# Altium PCB AD8428_shield.PcbDoc
Units mil, origin at the board's own origin, x right, y up, seen from the top; angles counter-clockwise.
Board outline 688 x 400 mil, 2 copper layers (Top, Bottom), stack 61.811 mil thick; 3 components, 8 nets, 16 pads, 0 vias.
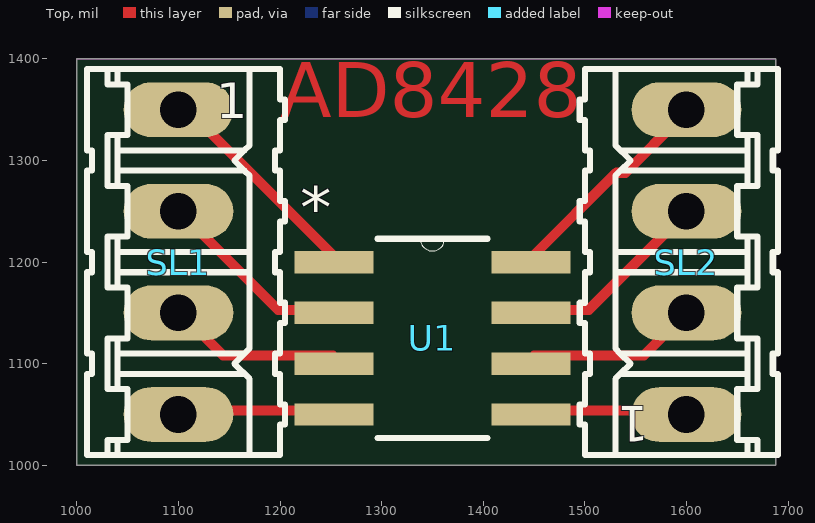
[diagram p0: Top view]
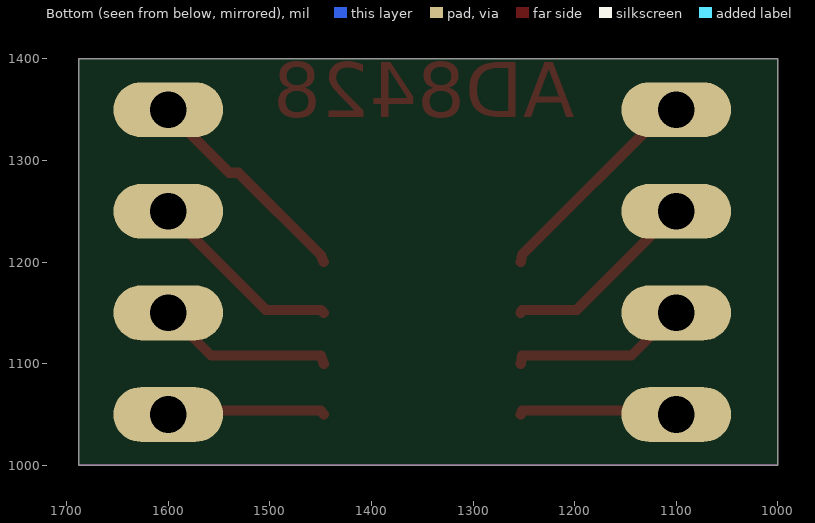
[diagram p1: Bottom view, seen from below]

## Layer stack, top to bottom
Top Solder: solder mask 0.4, Solder Resist, Dk 3.5
Top: signal copper 1.378
Dielectric 1: core 59.0551, FR-4, Dk 4.8
Bottom: signal copper 1.378
Bottom Solder: solder mask 0.4, Solder Resist, Dk 3.5

## Board outline
1000,1000 1688,1000 1688,1400 1000,1400

## Design rules (kind name [scope] priority, off if disabled: settings)
Clearance mdViaVia [IsVia vs IsVia] p1: gap=8
Clearance mdPadVia [IsPad vs IsVia] p2: gap=8
Clearance mdPadPad [IsPad vs IsPad] p3: gap=8
Clearance mdWireVia [(InLayerClass('Signal Layers') AND IsTrack) vs IsVia] p4: gap=8
Clearance mdWirePad [(InLayerClass('Signal Layers') AND IsTrack) vs IsPad] p5: gap=8
Clearance mdWireWire [(InLayerClass('Signal Layers') AND IsTrack) vs (InLayerClass('Signal Layers') AND IsTrack)] p6: gap=8
Clearance [All] p7: gap=8
HoleSize [All] p1: absolutevalues=TRUE maxlimit=100000 minlimit=24 maxpercent=80.000 minpercent=20.000
HoleToHoleClearance [All] p1: gap=8 allowstackedmicrovias=TRUE
PolygonConnect ThermalVias [IsVia] p1: connectstyle=Direct reliefconductorwidth=10 reliefentries=4 polygonreliefangle="90 Angle" airgapwidth=10
PolygonConnect [All] p2: connectstyle=Relief reliefconductorwidth=10 reliefentries=4 polygonreliefangle="90 Angle" airgapwidth=10
RoutingVias [All] p1: holewidth=28 width=50 viastyle="Through Hole" minholewidth=28 minwidth=50 maxholewidth=28 maxwidth=50
SilkToSilkClearance [All] p1 off: silktosilkclearance=10
SilkToSolderMaskClearance [IsPad] p1 off: minsilkscreentomaskgap=10 clearancetoexposedcopper=TRUE
SolderMaskExpansion [All] p1: expansion=4
UnpouredPolygon [All] p1: allowunpoured=FALSE
Width [All] p1: maxlimit=100000 minlimit=10 preferedwidth=10
25 further rules are at their usual default settings.

## Components (designator, comment, footprint, x,y, rotation, side; value= is the part's Value field where it differs from the comment)
SL1 "" 04P 1100,1200 r270 top
SL2 "" 04P 1600,1200 r90 top
U1 "AD8428ARZ" SOIC127P600X175-8N 1350,1125 r0 top

## Footprints (in the part's own frame and the unit in brackets; to place one, negate y for a bottom-side part, rotate by r counter-clockwise, add the part's x,y. Pads: shape width x height; smd on the part's side, far side on the other; paste and mask are expansions set on the pad)
04P [mil] "04P"
  oval 54x108 hole 36: 1(-150,0) 2(-50,0) 3(50,0) 4(150,0)
  silkscreen extent -190,-90 190,105
SOIC127P600X175-8N [mil] "SOIC127P600X175-8N"
  rect 78x22 smd: 1(-97,75) 2(-97,25) 3(-97,-25) 4(-97,-75) 5(97,-75) 6(97,-25) 7(97,25) 8(97,75)
  silkscreen extent -54,-98 54,98

## Part data
SL1 SL2: library part 04P
U1: library part SOIC127P600X175-8N

## Nets (pads, with @x,y where several pads share a name; then routed paths per layer and width w, separated by ;. In a path a pad name is that pad's centre, name@x,y a point inside that pad or via, vN(x,y) a via of type N, cw(c..) or ccw(c..) an arc to the next point about the centre after c; other vN are vias at no path point)
N$1: SL1.1 U1.1 | length 218.8
  Top w10: SL1.1 1108,1351 1252,1207 U1.1
N$2: SL1.2 U1.2 | length 195.1
  Top w10: SL1.2 1108,1243 1198,1153 1252,1153 U1.2
N$3: SL1.3 U1.3 | length 177
  Top w10: SL1.3 1108,1144 1144,1108 1252,1108 U1.3
N$4: SL1.4 U1.4 | length 157.1
  Top w10: SL1.4 1108,1054 1252,1054 U1.4
N$5: SL2.1 U1.5 | length 156.2
  Top w10: U1.5 1450,1054 1594,1054 SL2.1
N$6: SL2.2 U1.6 | length 175.9
  Top w10: U1.6 1450,1108 1558,1108 SL2.2
N$7: SL2.3 U1.7 | length 194.7
  Top w10: U1.7 1450,1153 1504,1153 1594,1243 SL2.3
N$8: SL2.4 U1.8 | length 217.5
  Top w10: U1.8 1450,1207 1531,1288 1540,1288 1594,1342 SL2.4

## Keep-outs
Keep-Out Layer:
  the board outline again, w0

## Other copper
Top:
  text "AD8428" at 1200,1325 h93

## Silkscreen, mask and mechanical layers (free items; w line width, h text height)
Dimension:
  the board outline again, w0

## Text inside footprints (layer, text, board x,y; h text height)
SL1: Top Overlay "1" at 1137,1330 h60.45
SL2: Top Overlay "1" at 1563,1070 h60.45 r180
U1: tDocu "*" at 1220,1217 h77.5; Top Overlay "*" at 1220,1217 h77.5